# Altium PCB PCB.pcbdoc (part 2 of 2)
Units mm, origin at the board's own origin, x right, y up, seen from the top; angles counter-clockwise.
Board outline 120.52 x 67.35 mm, 2 copper layers (Top Layer, Bottom Layer); 62 components, 40 nets, 228 pads, 79 vias.
Unrouted connection lines stored in the file: 3.
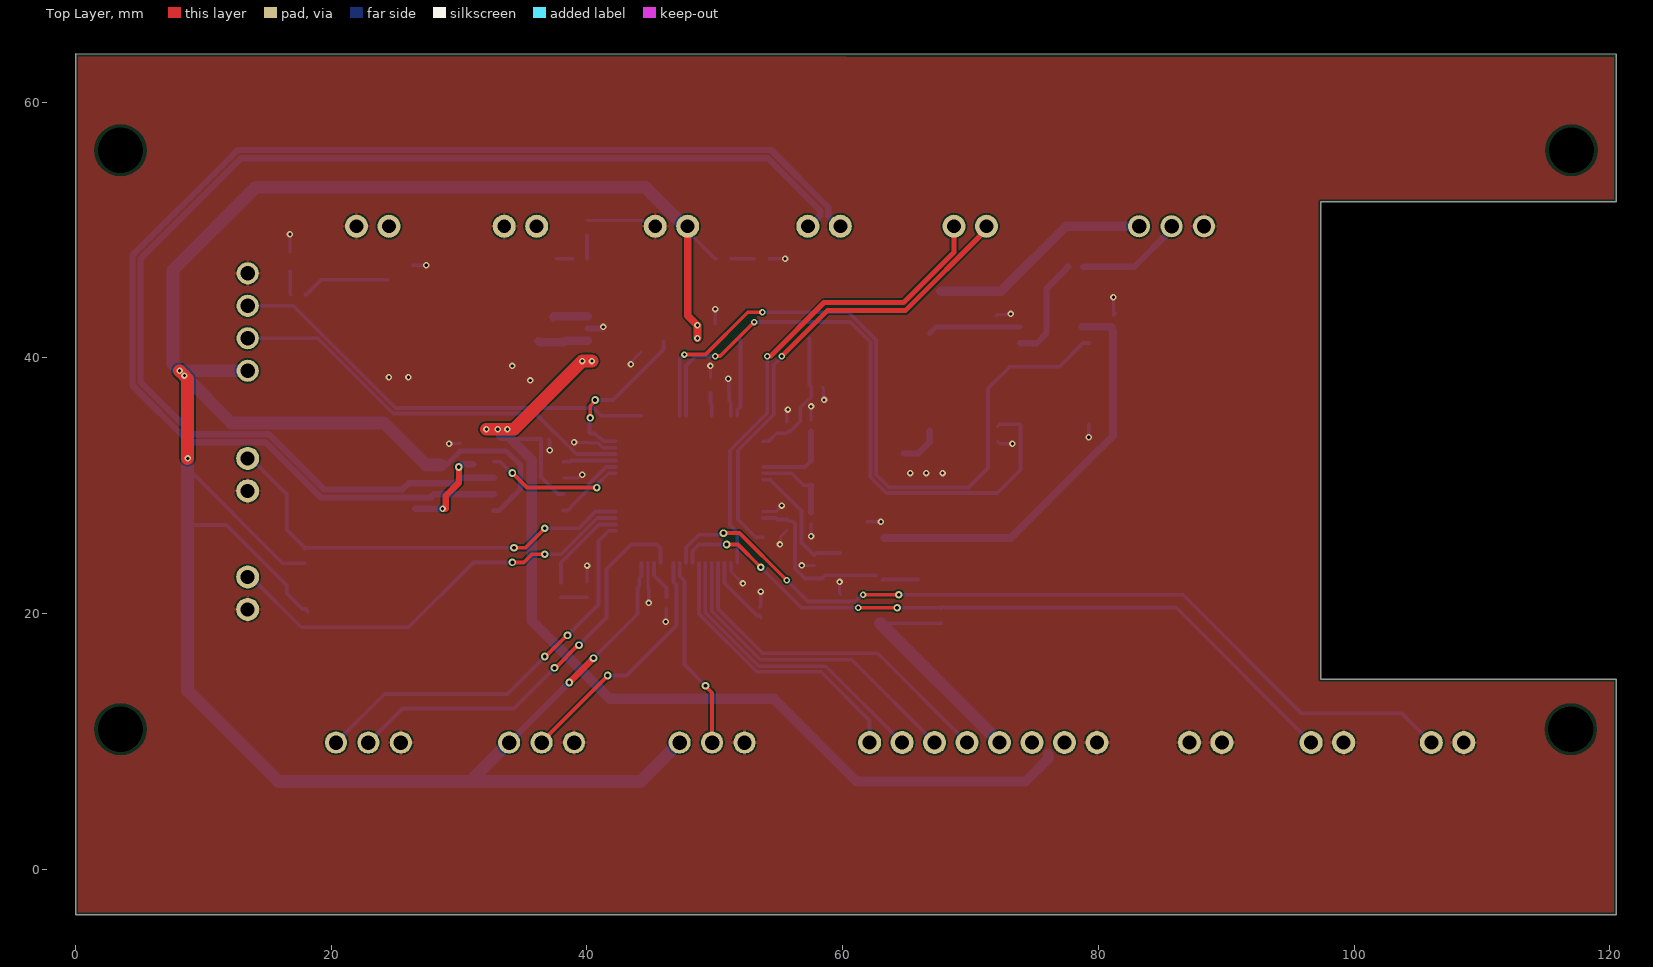
[diagram p0: Top Layer view]

## Via types
v1: diameter 0.508, hole 0.254, Top Layer to Bottom Layer, 57 vias
v2: diameter 0.6, hole 0.3, Top Layer to Bottom Layer, 22 vias

## Nets (pads, with @x,y where several pads share a name; then routed paths per layer and width w, separated by ;. In a path a pad name is that pad's centre, name@x,y a point inside that pad or via, vN(x,y) a via of type N, cw(c..) or ccw(c..) an arc to the next point about the centre after c; other vN are vias at no path point) (continued)
BUTTON1: IC4.37 J7.1 R1.1 | length 34.3
  Top Layer w0.3: v2(34.29,25.146) 35.179,25.146 v2(36.703,26.67)
  Bottom Layer w0.3: 13.716,32.131 16.51,29.337 16.51,26.558 17.907,25.161 R1.1@17.907,25.146 ; R1.1 R1.1@17.907,25.146 ; v2(34.29,25.146) R1.1@17.907,25.146 ; v2(36.703,26.67) 39.37,26.67 40.668,27.968 IC4.37
BUTTON2: IC4.25 J6.1 R3.1 | length 67.2
  Top Layer w0.3: v2(50.673,26.289) 51.943,26.289 v1(55.626,22.606) ; v1(61.595,21.463) v2(64.389,21.463)
  Bottom Layer w0.3: IC4.25 47.756,25.15 48.768,26.162 50.546,26.162 v2(50.673,26.289) ; v1(55.626,22.606) 57.295,20.937 60.988,20.937 61.41,21.359 61.435,21.359 61.539,21.463 v1(61.595,21.463) ; v2(64.389,21.463) 65.913,21.463 86.614,21.463 95.885,12.192 103.759,12.192 J6.1
BUTTON3: IC4.36 J4.1 R2.1 | length 33.7
  Top Layer w0.3: v2(34.163,24.003) 35.052,24.003 35.687,24.638 v2(36.703,24.638)
  Bottom Layer w0.3: 13.716,22.86 17.653,18.923 25.978,18.923 ; 26.035,18.923 31.115,24.003 v2(34.163,24.003) ; v2(36.703,24.638) 37.973,24.638 40.803,27.468 IC4.36
BUTTON4: IC4.24 J5.1 R4.1 | length 56
  Top Layer w0.3: v2(50.927,25.4) 51.816,25.4 v2(53.594,23.622) ; v1(61.214,20.447) v2(64.262,20.447)
  Bottom Layer w0.3: IC4.24 48.256,24.888 48.768,25.4 v2(50.927,25.4) ; v2(53.594,23.622) 56.769,20.447 v1(61.214,20.447) ; v2(64.262,20.447) R4.1@67.691,20.447 ; R4.1 67.691,20.462 86.091,20.462 96.647,9.906
CAN1_N: IC3.6 J1.1 | length 103.9
  Bottom Layer w0.5: IC3.6 28.025,29.337 27.759,29.071 19.189,29.071 14.852,33.408 13.187,33.408 13.18,33.401 8.892,33.401 4.453,37.84 4.453,48.014 11.813,55.374 11.815,55.374 12.694,56.253 54.389,56.253 58.86,51.782 58.86,51.108 59.803,50.165 J1.1@59.817,50.165
CAN1_P: IC3.7 J1.2 R8.1 S2.1 | length 101
  Bottom Layer w0.5: IC3.7 31.115,30.607 30.126,30.607 29.713,30.194 26.828,30.194 26.053,30.194 25.557,29.698 19.449,29.698 15.112,34.035 11.842,34.035 11.841,34.036 9.144,34.036 5.08,38.1 5.08,47.752 12.954,55.626 54.13,55.626 58.234,51.522 58.234,51.108 57.291,50.165 J1.2@57.277,50.165
CAN1_RX: IC3.4 IC4.44 | length 5.7
  Bottom Layer w0.3: IC3.4 38.502,28.067 38.733,28.298 38.733,28.319 40.132,29.718 40.132,30.099 41.501,31.468 IC4.44
CAN1_STBY: IC3.8 IC4.43 | length 11
  Top Layer w0.3: v2(34.163,30.988) 35.306,29.845 v2(40.767,29.845)
  Bottom Layer w0.3: IC3.8 33.203,31.877 34.092,30.988 v2(34.163,30.988) ; v2(40.767,29.845) 40.824,29.902 40.824,30.09 41.702,30.968 IC4.43
CAN1_TX: IC3.1 IC4.45 | length 4.1
  Bottom Layer w0.3: IC3.1 38.664,31.877 38.755,31.968 IC4.45
DOWNSHIFT: IC4.29 J15.2 | length 32.8
  Top Layer w0.3: v2(37.465,15.748) 37.529,15.748 39.306,17.526 v2(39.37,17.526)
  Bottom Layer w0.3: J15.2 25.574,12.573 34.29,12.573 v2(37.465,15.748) ; v2(39.37,17.526) 41.529,19.685 41.529,23.495 43.434,25.4 45.466,25.4 45.756,25.11 IC4.29
GND: C1.1 C2.1 C3.1 C4.1 C5.1 C6.1 C7.1 C8.2 C9.1 C10.1 C11.1 C12.1 C13.1 C14.1 C15.1 C16.1 C17.1 C18.1 C19.1 C20.1 C21.1 C22.2 D1.2 D2.2 D3.2 IC1.1 IC2.2 IC3.2 IC4.12 IC4.18 IC4.31 IC4.47 IC4.63 IC5.7 J2.2 J3.2 J4.2 J5.2 J6.2 J7.2 J9.1 J10.2 J11.8 J12.1 J12.2 J13.3 J14.3 J15.3 J16.1 R9.1 R10.2 R11.1 S1.1 | length 51.2
  Bottom Layer w0.254: D1.2 v1(16.764,49.657) ; C1.1 v1(27.432,47.244) ; v1(29.21,33.274) 29.238,33.302 30.071,33.302 C5.1 ; C6.1 37.036,33.655 37.084,33.607 v1(37.084,32.766) ; IC3.2 39.301,30.607 39.555,30.861 v1(39.624,30.861) ; v1(38.989,33.401) 39.018,33.372 40.103,33.372 C13.1 40.872,33.342 41.246,32.968 IC4.47 ; R10.2 v1(40.005,23.749) ; D2.2 44.356,50.74 45.185,49.911 J10.2@45.339,49.911 ; v1(43.434,39.497) 43.483,39.546 43.483,39.694 44.242,40.454 C4.1 ; IC4.31 44.765,23.959 44.765,22.028 C14.1 44.827,21.966 44.827,20.832 v1(44.831,20.828) ; v1(46.17,19.362) 46.199,19.391 46.199,20.359 C8.2 ; R9.1 v1(49.657,39.37) ; C19.1 v1(50.038,43.815) ; v1(51.054,38.354) 51.088,38.32 51.088,37.372 C16.1 51.122,36.605 51.256,36.471 IC4.63 ; IC4.18 51.265,23.959 51.265,23.284 v1(52.197,22.352) ; C15.1@53.492,20.463 C15.1 v1(53.594,21.717) ; IC4.12 53.765,27.977 54.774,27.977 v1(55.245,28.448) ; D3.2 v1(55.499,47.752) ; v1(55.095,25.4) 55.144,25.449 55.144,26.022 55.606,26.484 C11.1 ; C12.1 55.626,35.795 55.72,35.889 v1(55.72,35.958) ; v1(56.792,23.763) 56.799,23.756 57.778,23.756 C7.1 ; v1(57.531,26.035) C9.1 C9.1@57.551,26.992 ; C10.1 v1(57.531,36.195) ; C17.1 58.498,37.641 58.498,36.752 v1(58.547,36.703) ; v1(59.753,22.466) 59.753,21.552 S1.1 ; C18.1 v1(62.992,27.178) ; C21.1 72.096,43.385 73.103,43.385 v1(73.152,43.434) ; R11.1 72.136,33.447 72.309,33.274 v1(73.279,33.274) ; v1(79.248,33.782) 79.248,34.765 IC5.7 ; v1(81.183,44.734) C20.1 C20.1@81.203,43.307 ; C20.1@81.376,43.48 C20.1@81.376,43.5
  Bottom Layer w0.5: IC2.2 41.146,42.291 41.273,42.418 v1(41.275,42.418) ; 64.77,32.512 65.902,32.512 66.802,33.412 C22.2
  other v1: 65.278,30.988 66.548,30.988 67.818,30.988 35.56,38.227 24.511,38.481 26.035,38.481 34.163,39.37
NEOPIXEL: IC4.55 IC5.2 | length 58.2
  Top Layer w0.3: v1(47.625,40.259) 49.276,40.259 52.578,43.561 v1(53.721,43.561)
  Bottom Layer w0.3: IC4.55 47.256,39.89 v1(47.625,40.259) ; v1(53.721,43.561) 60.452,43.561 62.611,41.402 62.611,30.861 63.627,29.845 69.85,29.845 71.374,31.369 71.374,37.592 73.083,39.301 76.959,39.301 78.806,41.148 IC5.2
NEOPIXEL_R: J16.2 R12.2 | length 8.1
  Bottom Layer w0.5: R12.2 82.804,47.117 J16.2@85.725,50.038
NEOPIXEL_SH: IC5.13 R12.1 | length 8.3
  Bottom Layer w0.5: IC5.13 75.184,41.148 75.946,41.91 75.946,45.406 77.532,46.992 77.532,47.067 77.582,47.117 R12.1
NetD1_1: D1.1 R5.2 | length 1.8
  Bottom Layer w0.3: D1.1 16.794,46.718 16.794,44.988 R5.2
NetD2_1: D2.1 R6.1 | length 1.8
  Bottom Layer w0.3: R6.1 D2.1
NetD3_1: D3.1 R7.1 | length 1.8
  Bottom Layer w0.3: R7.1 D3.1
NetD4_2: D4.2 R10.1 | length 2
  Bottom Layer w0.3: D4.2 R10.1
NetR8_2: R8.2 S2.2 | length 7.1
  Top Layer w0.5: 28.956,28.194 28.956,29.21 29.99,30.244 29.99,31.447 v2(29.971,31.466)
  Bottom Layer w0.5: S2.2 v1(28.702,28.194) ; v2(29.971,31.466) 29.998,31.466 30.222,31.69 R8.2
NRST_n: C7.2 IC4.7 S1.2 | length 10
  Bottom Layer w0.3: IC4.7 54.31,30.468 56.769,28.009 56.769,25.566 57.765,24.57 57.785,24.57 57.935,24.72 58.112,24.72 58.131,24.739 S1.2
OSC_IN: C10.2 IC4.5 Y1.1 | length 6.3
  Bottom Layer w0.3: IC4.5 57.061,31.468 Y1.1
  Bottom Layer w0.45: Y1.1 C10.2
OSC_OUT: C9.2 IC4.6 Y1.2 | length 6.3
  Bottom Layer w0.3: IC4.6 56.001,30.968 56.931,30.038 Y1.2
  Bottom Layer w0.45: C9.2 Y1.2
RPOT1: IC4.26 J14.2 | length 15.1
  Top Layer w0.3: v2(49.276,14.351) 49.276,14.306 49.784,13.798 J14.2
  Bottom Layer w0.3: IC4.26 47.256,22.918 47.625,22.549 47.625,16.002 v2(49.276,14.351)
RPOT2: IC4.27 J13.2 | length 19.4
  Top Layer w0.3: J13.2 36.449,9.942 41.619,15.111 v2(41.619,15.147)
  Bottom Layer w0.3: v2(41.619,15.147) 43.087,15.147 46.99,19.05 46.99,22.225 46.756,22.459 IC4.27
SHIFT_OE: IC4.56 IC5.8 R11.2 | length 49.4
  Top Layer w0.3: v1(50.038,40.132) 50.045,40.139 50.426,40.139 v1(53.086,42.799)
  Bottom Layer w0.3: IC4.56 47.756,39.374 48.514,40.132 v1(50.038,40.132) ; v1(53.086,42.799) 60.61,42.799 62.184,41.225 62.184,30.653 63.419,29.418 72.09,29.418 73.914,31.242 73.914,34.765 IC5.8 72.286,34.798 R11.2@72.136,34.648
SPI1_MISO: IC4.22 J11.2 | length 23.5
  Bottom Layer w0.3: IC4.22 49.256,20.086 53.467,15.875 58.681,15.875 J11.2
SPI1_MOSI: IC4.23 J11.1 | length 22.5
  Bottom Layer w0.3: IC4.23 48.756,23.518 48.768,23.506 48.768,19.97 53.29,15.448 58.293,15.448 62.11,11.631 J11.1
SPI1_NSS: IC4.20 J11.4 | length 27.4
  Bottom Layer w0.3: IC4.20 50.256,20.356 53.721,16.891 62.745,16.891 J11.4
SPI1_SCK: IC4.21 J11.3 | length 25.5
  Bottom Layer w0.3: IC4.21 49.756,20.19 53.563,16.383 60.713,16.383 J11.3
STATUS_LED: D4.1 IC4.35 | length 7.1
  Bottom Layer w0.3: D4.1 37.973,24.003 40.938,26.968 IC4.35
SWCLK: IC4.49 J9.2 | length 34
  Bottom Layer w0.3: J9.2@13.843,44.069 17.018,44.069 25.019,36.068 40.513,36.068 41.113,35.468 IC4.49
SWDIO: IC4.46 J9.3 | length 32.2
  Bottom Layer w0.3: J9.3@13.843,41.529 18.954,41.529 24.842,35.641 35.987,35.641 39.16,32.468 IC4.46
UPSHIFT: IC4.34 J15.1 | length 31.7
  Top Layer w0.3: v2(36.703,16.637) 36.767,16.637 38.417,18.288 v2(38.481,18.288)
  Bottom Layer w0.3: J15.1 24.177,13.716 33.782,13.716 v2(36.703,16.637) ; v2(38.481,18.288) 40.894,20.701 40.894,25.66 41.702,26.468 IC4.34
USART2_RX: IC4.17 J8.2 | length 37.4
  Top Layer w0.4: v1(54.102,40.132) 54.123,40.153 54.377,40.153 58.547,44.323 64.77,44.323 68.707,48.26 J8.2@68.707,50.038
  Bottom Layer w0.3: IC4.17 51.756,26.349 51.181,26.924 51.181,32.766 54.102,35.687 v1(54.102,40.132)
USART2_TX: IC4.16 J8.1 | length 36.8
  Top Layer w0.4: v1(55.245,40.132) 58.801,43.688 64.897,43.688 J8.1@71.247,50.038
  Bottom Layer w0.3: IC4.16 53.202,25.968 51.816,27.354 51.816,32.766 54.61,35.56 54.61,39.441 55.245,40.076 v1(55.245,40.132)
VCAP_1: C8.1 IC4.30 | length 3.1
  Bottom Layer w0.3: IC4.30 45.256,22.967 46.228,21.995 C8.1
VCC3V3: C4.2 C5.2 C11.2 C12.2 C13.2 C14.2 C15.2 C16.2 C17.2 C18.2 C19.2 C20.2 IC2.5 IC3.5 IC4.1 IC4.13 IC4.19 IC4.32 IC4.48 IC4.64 IC5.1 J9.4 J10.1 J11.5 J13.1 J14.1 R1.2 R2.2 R3.2 R4.2 R7.2 | length 319.9
  Top Layer w0.3: v2(40.259,35.306) 40.259,36.241 40.64,36.622 v2(40.64,36.703)
  Top Layer w0.5: v2(38.608,14.605) v2(40.513,16.51)
  Top Layer w0.6: J10.1@47.879,49.911 47.879,43.307 v1(48.641,42.545) v1(48.641,41.529)
  Top Layer w1: v1(8.128,38.989) v1(8.509,38.608) 8.763,38.354 v1(8.763,32.131)
  Bottom Layer w0.3: 8.763,31.369 16.196,23.936 R1.2 ; 9.271,26.924 11.811,26.924 16.51,22.225 16.51,21.59 17.742,20.358 18.011,20.358 18.161,20.208 R2.2 ; v2(40.259,35.306) 40.202,35.249 40.202,34.292 C13.2 40.282,34.072 40.602,34.072 40.928,33.746 41.04,33.746 41.318,33.468 IC4.48 ; v2(40.513,16.51) 43.942,19.939 C14.2 ; v2(40.64,36.703) 42.037,36.703 45.974,40.64 45.974,41.275 ; C14.2@44.085,22.141 44.085,22.741 44.256,22.912 IC4.32 ; J10.1@47.879,49.911 47.879,49.896 50.023,47.752 R7.2 ; IC4.19 50.756,22.391 53.312,19.835 53.444,19.835 C15.2 ; IC4.64 51.756,35.918 52.002,36.164 C16.2 52.002,41.343 51.943,41.402 ; IC4.13 54.752,27.468 54.856,27.364 C11.2 ; IC4.1 54.206,33.468 54.842,34.104 C12.2 55.776,34.254 55.908,34.254 56.686,35.032 56.686,36.101 57.311,36.726 57.317,36.726 57.54,36.949 C17.2 57.404,37.855 57.404,41.529 ; C11.2@55.646,27.364 55.796,27.214 56.085,27.214 56.261,27.038 56.261,23.535 57.063,22.733 58.372,22.733 58.636,22.997 62.601,22.997 62.611,22.987 ; 62.939,19.237 R4.2 ; 63.119,22.606 63.186,22.673 R3.2
  Bottom Layer w0.4: 28.569,31.617 29.006,31.617 C5.2 33.711,32.71 34.798,31.623 34.798,29.732 33.133,28.067 IC3.5
  Bottom Layer w0.5: J13.1 v2(38.608,14.605)
  Bottom Layer w0.6: 63.246,25.908 73.152,25.908 79.18,31.936 81.153,33.909 81.153,42.095 81.046,42.202 81.046,42.418 IC5.1 IC5.1@78.74,42.418
  Bottom Layer w1: v1(8.509,38.608) 12.205,34.912 24.121,34.912 27.416,31.617 28.569,31.617 ; v1(8.763,32.131) 8.763,31.369 8.763,13.97 15.875,6.858 30.861,6.858 ; J9.4@13.843,38.989 8.509,38.989 v1(8.128,38.989) 7.62,39.497 7.62,46.863 14.097,53.34 44.577,53.34 47.225,50.692 47.263,50.692 47.663,50.292 J10.1 ; J13.1 30.861,6.858 ; J14.1 44.196,6.858 30.861,6.858 ; 62.939,19.237 J11.5
VCC5V: C2.2 C3.2 C6.2 C21.2 C22.1 IC1.2 IC1.4 IC2.1 IC2.3 IC3.3 IC5.14 J3.1 J11.6 J11.7 J16.3 R6.2 | length 113.5
  Top Layer w1: v1(32.131,34.417) v1(33.02,34.417) v1(33.782,34.417) 34.29,34.417 v1(39.624,39.751) v1(40.386,39.751)
  Bottom Layer w0.3: 34.036,33.655 C6.2 36.393,30.677 37.733,29.337 IC3.3 ; 37.592,47.752 R6.2
  Bottom Layer w0.4: C22.1 67.32,42.418 C21.2 IC5.14
  Bottom Layer w0.65: C2.2@36.195,41.313 36.301,41.207 C3.2 38.361,41.341 IC2.1 ; 37.338,43.18 37.399,43.241 IC2.3
  Bottom Layer w0.75: 67.691,45.212 72.39,45.212 77.47,50.292 J16.3
  Bottom Layer w0.8: 33.274,33.909 33.782,33.909 34.036,33.655 35.687,32.004 35.687,19.431 41.783,13.335 54.61,13.335 61.087,6.858 74.302,6.858 76.073,8.629 76.073,9.017
VCC12V: C1.2 IC1.3 J2.1 R5.1 | length 6.9
  Bottom Layer w0.3: R5.1 18.049,44.958 19.192,46.101 24.384,46.101
pads on no net: IC2.4 IC4.2 IC4.3 IC4.4 IC4.8 IC4.9 IC4.10 IC4.11 IC4.14 IC4.15 IC4.28 IC4.33 IC4.38 IC4.39 IC4.40 IC4.41 IC4.42 IC4.50 IC4.51 IC4.52 IC4.53 IC4.54 IC4.57 IC4.58 IC4.59 IC4.61 IC4.62 IC5.3 IC5.4 IC5.5 IC5.6 IC5.9 IC5.10 IC5.11 IC5.12 S2.3 S2.M

## Polygon pours and split planes (outlines as drawn)
VCC5V on Bottom Layer "Bottom Layer-VCC5V" (solid, remove dead copper, pour order 33): 59.944,44.577 65.405,39.116 68.961,39.116 68.961,45.974 62.484,45.974 61.722,46.736 60.706,46.736 37.846,46.736 37.846,51.943 34.671,51.943 34.671,43.688 33.655,43.688 33.655,44.704 29.718,44.704 29.718,43.18 23.876,43.18 23.876,40.894 28.956,40.894 28.956,39.624 33.274,39.624 34.417,40.767 37.465,40.767 37.465,43.688 37.465,44.577
GND on Bottom Layer "GND_L02_P019" (solid, pour order 19): 36.504,40.513 34.798,40.513 33.782,39.497 33.782,37.719 35.687,37.719 37.592,39.624 38.989,39.624 38.989,40.767 37.719,40.767 37.465,40.513
VCC3V3 on Bottom Layer "Bottom Layer-VCC3V3" (solid, remove dead copper, pour order 29): 63.627,18.669 63.627,26.289 61.468,26.289 61.468,41.402 60.706,42.164 59.817,42.164 49.276,42.164 49.276,43.18 48.006,43.18 48.006,42.164 46.355,42.164 41.783,42.164 41.783,40.64 43.053,40.64 43.307,40.894 45.974,40.894 59.817,40.894 59.817,25.527 61.595,25.527 62.103,25.019 62.103,20.066 52.832,20.066 52.832,18.669
GND on Bottom Layer "GND_L02_P034" (solid, remove dead copper, pour order 34): 68.707,37.338 68.707,30.48 64.389,30.48 64.389,37.338
VCC5V on Bottom Layer "VCC5V_L02_P035" (solid, pour order 35): 40.894,41.656 39.116,41.656 39.116,39.243 40.894,39.243
VCC5V on Bottom Layer "VCC5V_L02_P036" (solid, remove dead copper, pour order 36): 34.417,35.052 34.417,33.401 31.115,33.401 31.115,35.052
VCC5V on Bottom Layer "VCC5V_L02_P037" (solid, remove dead copper, pour order 37): 78.867,11.176 78.867,8.382 73.406,8.382 73.406,11.176
GND on Bottom Layer "GND_L02_P038" (solid, pour order 38): 26.67,40.64 26.67,38.1 23.622,38.1 23.622,40.64
VCC12V on Bottom Layer "VCC12V_L02_P012" (solid, pour order 12): 25.908,51.816 25.908,45.847 27.051,45.847 27.051,43.307 23.114,43.307 23.114,51.816
GND on Top Layer "GND_L01_P010" (solid, pour order 10): -4.699,67.945 -4.699,-5.461 -2.794,-3.556 128.27,-3.556 128.27,69.85 125.857,72.263

## Silkscreen, mask and mechanical layers (free items; w line width, h text height)
Bottom Overlay:
  text "Neopixel" at 93.091,46.99 h1.52
  text "3.3V" at 49.022,46.736 h1.52
  text "CAN" at 60.833,46.609 h1.52
  text "RX TX" at 73.279,46.609 h1.52
  text "12V" at 22.987,46.482 h1.52
  text "5V" at 36.195,46.482 h1.52
  text "GND / SWCLK / SWDIO / 3V3" at 23.114,34.036 h1.52
  text "Button 3" at 15.621,23.876 h0.8 r270
  text "Button 4" at 16.002,14.605 h0.8 r270
  text "Shifting" at 16.002,12.827 h1.52 r90
  text "Button 1" at 100.457,12.319 h0.8
  text "Screen GND" at 92.202,12.192 h0.8
  text "Button 2" at 110.363,12.192 h0.8
  text "Dial 1" at 51.689,12.065 h0.8
  text "Dial 2" at 38.608,11.938 h0.8
  text "GND / 5V / 5V / 3V3 / NSS / SCK / MISO / MOSI" at 61.468,11.43 h1.52 r270